# Altium PCB WEST_Radio_AX5043.PcbDoc (part 1 of 3)
Units mil, origin at the board's own origin, x right, y up, seen from the top; angles counter-clockwise.
Board outline 6000 x 4000 mil, 2 copper layers (Top Layer, Bottom Layer); 127 components, 96 nets, 412 pads, 18 vias.
Unrouted connection lines stored in the file: 276.
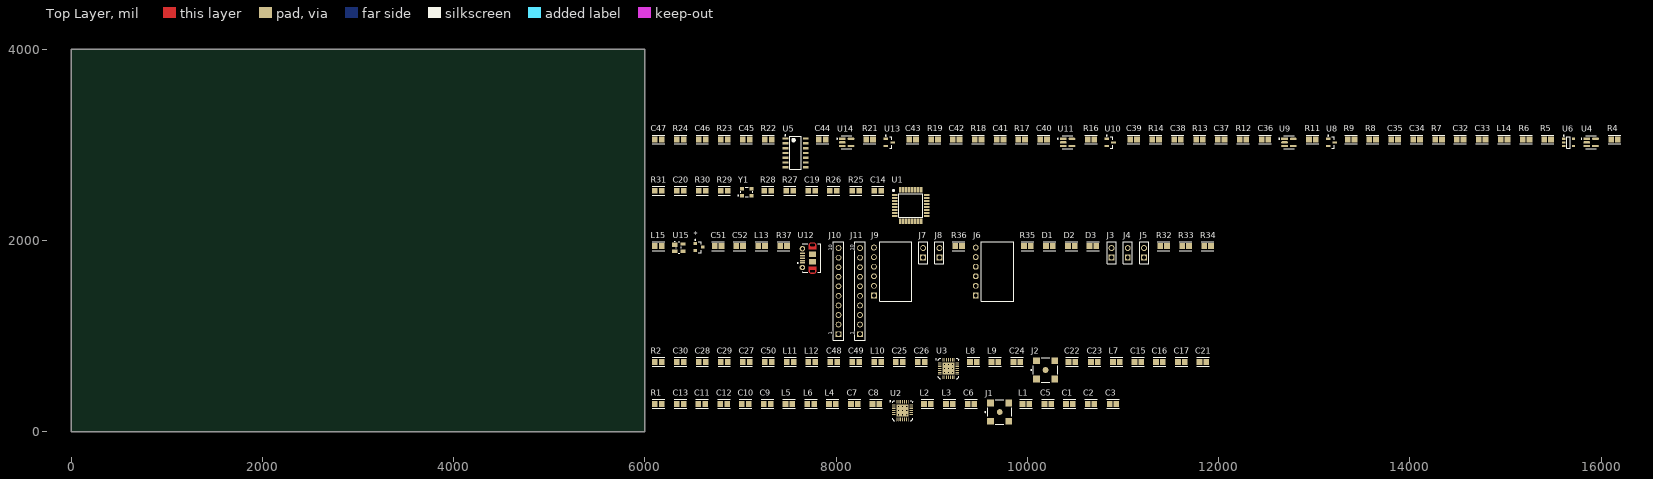
[diagram p0: Top Layer view]
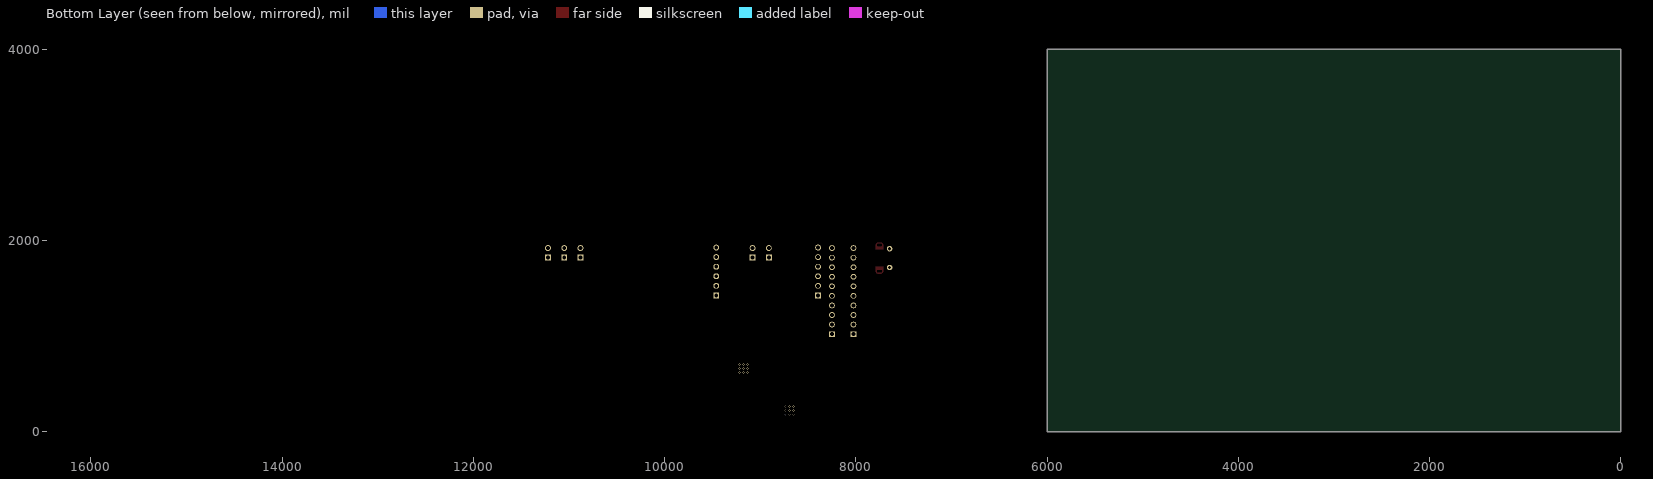
[diagram p1: Bottom Layer view, seen from below]

## Layer stack, top to bottom
Top Solder: solder mask 0.4, Solder Resist, Dk 3.5
Top Layer: signal copper 1.4
Dielectric 1: dielectric 12.6, FR-4, Dk 4.8
Bottom Layer: signal copper 1.4
Bottom Solder: solder mask 0.4, Solder Resist, Dk 3.5

## Board outline
0,0 6000,0 6000,4000 0,4000

## Design rules (kind name [scope] priority, off if disabled: settings)
Clearance [All] p1: gap=10 ignorepadtopadclearanceinfootprint=FALSE except(0: Arc-Hole Track-Hole SMDPad-Hole THPad-Hole Via-Hole Fill-Hole Poly-Hole Region-Hole Text-Hole)
PolygonConnect [All] p1: connectstyle=Relief reliefconductorwidth=10 reliefentries=4 polygonreliefangle="90 Angle" airgapwidth=10
RoomDefinition power_regulation [InComponentClass('power_regulation')] p1: confinementstyle=ConfineIn formatcopy=TRUE lockcomponents=FALSE outline 6045,2730 16235,2730 16235,3215 6045,3215
RoomDefinition mcu [InComponentClass('mcu')] p2: confinementstyle=ConfineIn formatcopy=TRUE lockcomponents=FALSE outline 6045,2150 8995,2150 8995,2680 6045,2680
RoomDefinition connectors [InComponentClass('connectors')] p3: confinementstyle=ConfineIn formatcopy=TRUE lockcomponents=FALSE outline 6045,940 11985,940 11985,2100 6045,2100
RoomDefinition comms_vhf [InComponentClass('comms_vhf')] p4: confinementstyle=ConfineIn formatcopy=TRUE lockcomponents=FALSE outline 6045,500 11930,500 11930,890 6045,890
RoomDefinition comms_uhf [InComponentClass('comms_uhf')] p5: confinementstyle=ConfineIn formatcopy=TRUE lockcomponents=FALSE outline 6045,60 10990,60 10990,450 6045,450
RoutingVias [All] p1: holewidth=28 width=50 viastyle="Through Hole" minholewidth=28 minwidth=50 maxholewidth=28 maxwidth=50
SolderMaskExpansion [All] p1: expansion=4 istentingtop=FALSE
Width [All] p1: maxlimit=10 minlimit=10 preferedwidth=10
30 further rules are at their usual default settings.

## Classes and differential pairs
component class power_regulation: C31 C32 C33 C34 C35 C36 C37 C38 C39 C40 C41 C42 C43 C44 C45 C46 C47 L14 R3 R4 R5 R6 R7 R8 R9 R10 R11 R12 R13 R14 R15 R16 R17 R18 R19 R20 R21 R22 R23 R24 U4 U5 U6 U8 U9 U10 U11 U13 U14
component class mcu: C14 C19 C20 R25 R26 R27 R28 R29 R30 R31 U1 Y1
component class connectors: * C51 C52 D1 D2 D3 J3 J4 J5 J6 J7 J8 J9 J10 J11 L13 L15 R32 R33 R34 R35 R36 R37 U12 U15
component class comms_vhf: C15 C16 C17 C18 C21 C22 C23 C24 C25 C26 C27 C28 C29 C30 C48 C49 C50 J2 L7 L8 L9 L10 L11 L12 R2 U3
component class comms_uhf: C1 C2 C3 C4 C5 C6 C7 C8 C9 C10 C11 C12 C13 J1 L1 L2 L3 L4 L5 L6 R1 U2

## Components (designator, comment, footprint, x,y, rotation, side; value= is the part's Value field where it differs from the comment)
* "BZX84C6V2LT1G" ONSC-SOT-23-3-318-08_V 6565,1930 r0 top
C1 "100pF" FP-C0805C-DN-IPC_A 10440,290 r0 top
C2 "100pF" FP-C0805C-DN-IPC_A 10665,290 r0 top
C3 "0.1uF" FP-C0805C-DN-IPC_A 10895,290 r0 top
C5 "11pF" FP-C0805C-DN-IPC_A 10215,290 r0 top
C6 "4.3pF" FP-C0805C-DN-IPC_A 9410,290 r0 top
C7 "4.3pF" FP-C0805C-DN-IPC_A 8190,290 r0 top
C8 "5.1pF" FP-C0805C-DN-IPC_A 8415,290 r0 top
C9 "5.6pF" FP-C0805C-DN-IPC_A 7280,290 r0 top
C10 "10pF" FP-C0805C-DN-IPC_A 7050,290 r0 top
C11 "0.01uF" FP-C0805C-DN-IPC_A 6595,290 r0 top
C12 "0.01uF" FP-C0805C-DN-IPC_A 6825,290 r0 top
C13 "6.8pF" FP-C0805C-DN-IPC_A 6370,290 r0 top
C14 "0.1uF" FP-C0805C-DN-IPC_A 8435,2520 r0 top
C15 "100pF" FP-C0805C-DN-IPC_A 11155,730 r0 top
C16 "100pF" FP-C0805C-DN-IPC_A 11380,730 r0 top
C17 "0.1uF" FP-C0805C-DN-IPC_A 11610,730 r0 top
C19 "0.1uF" FP-C0805C-DN-IPC_A 7745,2520 r0 top
C20 "0.1uF" FP-C0805C-DN-IPC_A 6370,2520 r0 top
C21 "6.8pF" FP-C0805C-DN-IPC_A 11835,730 r0 top
C22 "10pF" FP-C0805C-DN-IPC_A 10465,730 r0 top
C23 "12pF" FP-C0805C-DN-IPC_A 10700,730 r0 top
C24 "10pF" FP-C0805C-DN-IPC_A 9890,730 r0 top
C25 "10pF" FP-C0805C-DN-IPC_A 8660,730 r0 top
C26 "12pF" FP-C0805C-DN-IPC_A 8890,730 r0 top
C27 "10pF" FP-C0805C-DN-IPC_A 7060,730 r0 top
C28 "0.01uF" FP-C0805C-DN-IPC_A 6600,730 r0 top
C29 "0.01uF" FP-C0805C-DN-IPC_A 6830,730 r0 top
C30 "6.8pF" FP-C0805C-DN-IPC_A 6370,730 r0 top
C32 "0.1uF" FP-C0805C-DN-IPC_A 14525,3055 r0 top
C33 "0.1uF" FP-C0805C-DN-IPC_A 14755,3055 r0 top
C34 "10uF" FP-C0805C-DN-IPC_A 14070,3055 r0 top
C35 "0.1uF" FP-C0805C-DN-IPC_A 13840,3055 r0 top
C36 "1uF" FP-C0805C-DN-IPC_A 12485,3055 r0 top
C37 "1uF" FP-C0805C-DN-IPC_A 12025,3055 r0 top
C38 "0.1uF" FP-C0805C-DN-IPC_A 11570,3055 r0 top
C39 "0.1uF" FP-C0805C-DN-IPC_A 11110,3055 r0 top
C40 "1uF" FP-C0805C-DN-IPC_A 10170,3055 r0 top
C41 "1uF" FP-C0805C-DN-IPC_A 9715,3055 r0 top
C42 "0.1uF" FP-C0805C-DN-IPC_A 9255,3055 r0 top
C43 "0.1uF" FP-C0805C-DN-IPC_A 8800,3055 r0 top
C44 "1uF" FP-C0805C-DN-IPC_A 7855,3055 r0 top
C45 "1uF" FP-C0805C-DN-IPC_A 7060,3055 r0 top
C46 "0.1uF" FP-C0805C-DN-IPC_A 6600,3055 r0 top
C47 "0.1uF" FP-C0805C-DN-IPC_A 6140,3055 r0 top
C48 "27pF" FP-C0805C-DN-IPC_A 7975,730 r0 top
C49 "27pF" FP-C0805C-DN-IPC_A 8205,730 r0 top
C50 "10pF" FP-C0805C-DN-IPC_A 7290,730 r0 top
C51 "0.1uF" FP-C0805C-DN-IPC_A 6765,1940 r0 top
C52 "10uF" FP-C0805C-DN-IPC_A 6990,1940 r0 top
D1 "Blue" FP-C0805C-DN-IPC_A 10230,1940 r0 top
D2 "Blue" FP-C0805C-DN-IPC_A 10460,1940 r0 top
D3 "Blue" FP-C0805C-DN-IPC_A 10685,1940 r0 top
J1 "SMA" FP-73251-1350-MFG 9710,205 r0 top
J2 "SMA" FP-73251-1350-MFG 10190,645 r0 top
J3 "PA1" SMTC-SSQ-102-01-X-S 10880,1820 r90 top
J4 "PB9" SMTC-SSQ-102-01-X-S 11050,1820 r90 top
J5 "PB2" SMTC-SSQ-102-01-X-S 11220,1820 r90 top
J6 "UART" SMTC-SSW-106-02-X-S-RA 9460,1425 r90 top
J7 "DATA_V" SMTC-SSQ-102-01-X-S 8910,1820 r90 top
J8 "DATA_U" SMTC-SSQ-102-01-X-S 9080,1820 r90 top
J9 "SWD" SMTC-SSW-106-02-X-S-RA 8395,1425 r90 top
J10 "SPI_U" 61301011821 8025,1470 r90 top
J11 "SPI_V" 61301011821 8250,1470 r90 top
L1 "100nH" FP-C0805C-DN-IPC_A 9985,290 r0 top
L2 "43nH" FP-C0805C-DN-IPC_A 8955,290 r0 top
L3 "27nH" FP-C0805C-DN-IPC_A 9185,290 r0 top
L4 "43nH" FP-C0805C-DN-IPC_A 7960,290 r0 top
L5 "100nH" FP-C0805C-DN-IPC_A 7505,290 r0 top
L6 "27nH" FP-C0805C-DN-IPC_A 7735,290 r0 top
L7 "150nH" FP-C0805C-DN-IPC_A 10930,730 r0 top
L8 "120nH" FP-C0805C-DN-IPC_A 9435,730 r0 top
L9 "68nH" FP-C0805C-DN-IPC_A 9660,730 r0 top
L10 "120nH" FP-C0805C-DN-IPC_A 8435,730 r0 top
L11 "150nH" FP-C0805C-DN-IPC_A 7520,730 r0 top
L12 "68nH" FP-C0805C-DN-IPC_A 7745,730 r0 top
L13 "BLM21AG121SN1D" FP-C0805C-DN-IPC_A 7220,1940 r0 top
L14 "2.2uH" FP-C0805C-DN-IPC_A 14985,3055 r0 top
L15 "BLM21AG121SN1D" FP-C0805C-DN-IPC_A 6140,1940 r0 top
R1 "0ohm" FP-C0805C-DN-IPC_A 6140,290 r0 top
R2 "0ohm" FP-C0805C-DN-IPC_A 6140,730 r0 top
R4 "510k" FP-C0805C-DN-IPC_A 16140,3055 r0 top
R5 "510k" FP-C0805C-DN-IPC_A 15440,3055 r0 top
R6 "510k" FP-C0805C-DN-IPC_A 15215,3055 r0 top
R7 "510k" FP-C0805C-DN-IPC_A 14300,3055 r0 top
R8 "130K" FP-C0805C-DN-IPC_A 13610,3055 r0 top
R9 "100k" FP-C0805C-DN-IPC_A 13385,3055 r0 top
R11 "510k" FP-C0805C-DN-IPC_A 12980,3055 r0 top
R12 "510k" FP-C0805C-DN-IPC_A 12255,3055 r0 top
R13 "510k" FP-C0805C-DN-IPC_A 11800,3055 r0 top
R14 "330K" FP-C0805C-DN-IPC_A 11340,3055 r0 top
R16 "510k" FP-C0805C-DN-IPC_A 10665,3055 r0 top
R17 "510k" FP-C0805C-DN-IPC_A 9940,3055 r0 top
R18 "510k" FP-C0805C-DN-IPC_A 9485,3055 r0 top
R19 "330K" FP-C0805C-DN-IPC_A 9030,3055 r0 top
R21 "510k" FP-C0805C-DN-IPC_A 8350,3055 r0 top
R22 "510k" FP-C0805C-DN-IPC_A 7290,3055 r0 top
R23 "510k" FP-C0805C-DN-IPC_A 6830,3055 r0 top
R24 "330K" FP-C0805C-DN-IPC_A 6370,3055 r0 top
R25 "100R" FP-C0805C-DN-IPC_A 8205,2520 r0 top
R26 "10K" FP-C0805C-DN-IPC_A 7970,2520 r0 top
R27 "0ohm" FP-C0805C-DN-IPC_A 7515,2520 r0 top
R28 "0ohm" FP-C0805C-DN-IPC_A 7285,2520 r0 top
R29 "0ohm" FP-C0805C-DN-IPC_A 6830,2520 r0 top
R30 "0ohm" FP-C0805C-DN-IPC_A 6600,2520 r0 top
R31 "0ohm" FP-C0805C-DN-IPC_A 6140,2520 r0 top
R32 "1k" FP-C0805C-DN-IPC_A 11425,1940 r0 top
R33 "1k" FP-C0805C-DN-IPC_A 11655,1940 r0 top
R34 "1k" FP-C0805C-DN-IPC_A 11885,1940 r0 top
R35 "1k" FP-C0805C-DN-IPC_A 10000,1940 r0 top
R36 "1k" FP-C0805C-DN-IPC_A 9280,1940 r0 top
R37 "100k" FP-C0805C-DN-IPC_A 7450,1940 r0 top
U1 "STM32G0B1KET6" QFP80P900X900X160-32N 8780,2365 r0 top
U2 "AX5043" QFN50P500X500X90_HS-29N 8695,220 r0 top
U3 "AX5043" QFN50P500X500X90_HS-29N 9175,660 r0 top
U4 "INA168" FP-DBV0005A-IPC_A 15895,3025 r0 top
U5 "LMV324IDR" D0014A_V 7575,2915 r0 top
U6 "LMR10515YMFE" SOT95P245X145-5N 15660,3025 r0 top
U8 "MCP1700_3.3" SOT-23-TT3_L 13180,3025 r0 top
U9 "INA168" FP-DBV0005A-IPC_A 12735,3025 r0 top
U10 "MCP1700_3.3" SOT-23-TT3_L 10865,3025 r0 top
U11 "INA168" FP-DBV0005A-IPC_A 10420,3025 r0 top
U12 "MicroUSB_1050170001" USB-MICRO-B_V 7700,1815 r90 top
U13 "MCP1700_3.3" SOT-23-TT3_L 8555,3025 r0 top
U14 "INA168" FP-DBV0005A-IPC_A 8110,3025 r0 top
U15 "TVS_DIODE_SP0503BAHTG" LFUS-SOT143-4_V 6355,1925 r0 top
Y1 "16MHz" OSCCC320X250X100N 7065,2505 r0 top

## Footprints (in the part's own frame and the unit in brackets; to place one, negate y for a bottom-side part, rotate by r counter-clockwise, add the part's x,y. Pads: shape width x height; smd on the part's side, far side on the other; paste and mask are expansions set on the pad)
61301011821 [mm] "Socket Header, Pitch 2.54 mm, THT, Vertical, single row, 10p"
  rect 1.52x1.52 hole 1.02: 1(-11.43,0)
  round 1.52 hole 1.02: 2(-8.89,0) 3(-6.35,0) 4(-3.81,0) 5(-1.27,0) 6(1.27,0) 7(3.81,0) 8(6.35,0) 9(8.89,0) 10(11.43,0)
  silkscreen extent -13.08,-1.35 13.08,1.35, body extent -12.95,-1.25 12.95,1.25, height 8.55
D0014A_V [mm] "SOIC, 14-Leads, Body 8.75x4mm, Pitch 1.27mm"
  rect 1.55x0.6 smd: 1(-2.7,3.81) 2(-2.7,2.54) 3(-2.7,1.27) 4(-2.7,0) 5(-2.7,-1.27) 6(-2.7,-2.54) 7(-2.7,-3.81) 8(2.7,-3.81) 9(2.7,-2.54) 10(2.7,-1.27) 11(2.7,0) 12(2.7,1.27) 13(2.7,2.54) 14(2.7,3.81)
  silkscreen extent -2.82,-4.4 1.53,4.78, body extent -3,-4.4 3,4.4, height 1.75
FP-73251-1350-MFG [mil]
  round 60 smd paste+0 mask+0: 1(0,0)
  rect 70x70 smd paste+0 mask+0: 2(-95,95) 3(95,95) 4(-95,-95) 5(95,-95)
  silkscreen extent -155,-127 127,127, body extent -134,-134 134,134, height 10
FP-C0805C-DN-IPC_A [mil]
  rect 59.24x61.27 smd paste+0 mask+0: 1(-35.46,0) 2(35.46,0)
  silkscreen extent -65,-46 65,46, body extent -85,-50 85,50, height 10
FP-DBV0005A-IPC_A [mm]
  rect 1.805x0.612 smd paste+0 mask+0: 1(-1.15,0.95)
  rrect100% 1.805x0.612 smd paste+0 mask+0: 2(-1.15,0) 3(-1.15,-0.95) 4(1.15,-0.95) 5(1.15,0.95)
  silkscreen extent -2.68,-1.7 1.4,1.7, body extent -2.55,-1.95 2.55,1.95, height 0.25
LFUS-SOT143-4_V [mm] "SOT143, 4-Leads, Body 3.04x1.4mm, Pitch 1.90mm"
  rect 1.4x1.1 smd: 1(-1.1,0.75)
  rect 1.4x0.9 smd: 2(-1.1,-0.95) 3(1.1,-0.95) 4(1.1,0.95)
  silkscreen extent -1.15,-1.5 0.7,1.65, body extent -0.7,-1.52 0.7,1.52, height 1.22
ONSC-SOT-23-3-318-08_V [mm] "SOT23, 3-Leads, Body 2.92x1.3mm, Pitch 0.95mm"
  rect 0.9x0.8 smd: 1(-1,0.95) 2(-1,-0.95) 3(1,0)
  silkscreen extent -1.12,-1.46 0.65,2.02, body extent -0.65,-1.46 0.65,1.46, height 1.11
OSCCC320X250X100N [mm]
  rect 1.02x0.92 smd: 1(-1.225,-0.925) 2(1.225,-0.925) 3(1.225,0.925) 4(-1.225,0.925)
  silkscreen extent -2.35,-1.25 1.6,1.25, body extent -1.6,-1.25 1.6,1.25, height 1
QFN50P500X500X90_HS-29N [mm] "QFN, 28-Leads, Body 5.00x5.00mm, Pitch 0.50mm, Thermal Pad 3.25x3.25mm, IPC Medium Density"
  oval 1x0.25 smd: 1(-2.325,1.5) 2(-2.325,1) 3(-2.325,0.5) 4(-2.325,0) 5(-2.325,-0.5) 6(-2.325,-1) 7(-2.325,-1.5) 15(2.325,-1.5) 16(2.325,-1) 17(2.325,-0.5) 18(2.325,0) 19(2.325,0.5) 20(2.325,1) 21(2.325,1.5)
  oval 0.25x1 smd: 8(-1.5,-2.325) 9(-1,-2.325) 10(-0.5,-2.325) 11(0,-2.325) 12(0.5,-2.325) 13(1,-2.325) 14(1.5,-2.325) 22(1.5,2.325) 23(1,2.325) 24(0.5,2.325) 25(0,2.325) 26(-0.5,2.325) 27(-1,2.325) 28(-1.5,2.325)
  rect 3.25x3.25 smd: 29(0,0)
  silkscreen extent -3.45,-2.68 2.68,2.67, body extent -2.6,-2.6 2.6,2.6, height 0.95
QFP80P900X900X160-32N [mm]
  rect 1.475x0.6 smd: 1(-4.238,2.8) 2(-4.238,2) 3(-4.238,1.2) 4(-4.238,0.4) 5(-4.238,-0.4) 6(-4.238,-1.2) 7(-4.238,-2) 8(-4.238,-2.8) 17(4.238,-2.8) 18(4.238,-2) 19(4.238,-1.2) 20(4.238,-0.4) 21(4.238,0.4) 22(4.238,1.2) 23(4.238,2) 24(4.238,2.8)
  rect 0.6x1.475 smd: 9(-2.8,-4.238) 10(-2,-4.238) 11(-1.2,-4.238) 12(-0.4,-4.238) 13(0.4,-4.238) 14(1.2,-4.238) 15(2,-4.238) 16(2.8,-4.238) 25(2.8,4.238) 26(2,4.238) 27(1.2,4.238) 28(0.4,4.238) 29(-0.4,4.238) 30(-1.2,4.238) 31(-2,4.238) 32(-2.8,4.238)
  silkscreen extent -4.77,-3.15 3.15,4.2, body extent -4.5,-4.5 4.5,4.5, height 1.6
SMTC-SSQ-102-01-X-S [mm] "SQ Post Socket, 1x2 Pins, Vertical, 2.54mm Pitch, Female"
  rect 1.55x1.55 hole 1.02: 1(0,0)
  round 1.55 hole 1.02: 2(2.54,0)
  silkscreen extent -1.65,-1.2 4.19,1.2, body extent -1.52,-1.21 4.06,1.21, height 8.51
SMTC-SSW-106-02-X-S-RA [mm] "SQ Post Socket, 1x6 Pins, Right Angle, 2.54mm Pitch, Female"
  rect 1.55x1.55 hole 1.04: 1(0,0)
  round 1.55 hole 1.04: 2(2.54,0) 3(5.08,0) 4(7.62,0) 5(10.16,0) 6(12.7,0)
  silkscreen extent -1.53,-10.03 14.23,-1.52, body extent -1.52,-10.03 14.22,0.2, height 2.41
SOT95P245X145-5N [mm] "SOT23, 5-Leads, Body 2.96x2.45mm, Pitch 0.95mm, IPC Medium Density"
  rect 0.85x0.6 smd: 1(-1.275,0.95) 2(-1.275,0) 3(-1.275,-0.95) 4(1.275,-0.95) 5(1.275,0.95)
  silkscreen extent -1.4,-1.55 0.45,1.92, body extent -0.85,-1.55 0.85,1.55, height 1.45
SOT-23-TT3_L [mm] "SOT23, 3-Leads, Body 2.9x1.3mm, Pitch 0.95mm, Lead Span 2.4mm, IPC High Density"
  rect 1.2x0.6 smd: 1(-0.9,0.95) 2(-0.9,-0.95) 3(0.9,0)
  silkscreen extent -1.02,-1.55 0.7,1.92, body extent -0.7,-1.52 0.7,1.53, height 1.12
USB-MICRO-B_V [mm] "USB, MICRO B, Body 7.491x4.695 mm, Pitch 0.65 mm"
  rect 0.4x1.35 smd: 1(-1.3,1.35) 2(-0.65,1.35) 3(0,1.35) 4(0.65,1.35) 5(1.3,1.35)
  round 1.45 hole 0.85: 6(-2.5,1.35) 7(2.5,1.35)
  rrect50% 0x0 hole 0.6 slot 1.3 at 90 deg: 8(-3.5,-1.35) 11(3.5,-1.35)
  rect 1.5x1.9 smd: 9(-1,-1.35) 10(1,-1.35)
  Top Layer circle w0.5: c3.6,-0.9 r0.25
  Top Layer circle w0.5: c3.6,-1.8 r0.25
  Top Layer circle w0.5: c-3.6,-0.9 r0.25
  Top Layer circle w0.5: c-3.6,-1.8 r0.25
  Top Layer region: -2.3,-2.3 -2.3,-0.4 -3.6,-0.4 -3.6,-2.3
  Top Layer region: 2.3,-0.4 2.3,-2.3 3.6,-2.3 3.6,-0.4
  Top Layer region: 3.6,-0.9 3.6,-1.8 4.1,-1.8 4.1,-0.9
  Top Layer region: -3.6,-1.8 -3.6,-0.9 -4.1,-0.9 -4.1,-1.8
  silkscreen extent -3.75,-3.5 3.75,2.7, body extent -4.1,-3.9 4.1,1.5, height 2.67

## Part data
*: "Vz=6.2V 5.8V~6.6V Izt=5mA P=250mW", Breakdown Voltage=6.6V, Case/Package=SOT-23, Forward Voltage=900mV, Manufacturer="ON Semiconductor", Max Operating Temperature=150°C, Max Power Dissipation=225mW, Max Reverse Current=3uA, Min Operating Temperature=-65°C, Package Quantity=3000, Power Dissipation=300mW, Supplier Part Number 1=BZX84C6V2LT1GOSCT-ND, Test Current=5mA, Tolerance=6%, Voltage Rating (DC)=6.2V, Zener Current=10mA, Category="Zener Diodes", ComponentLink1Description=https://datasheet.ciiva.com/18434/70100187-18434638.pdf?src-supplier=Allied+Electronics, ComponentLink1URL=https://datasheet.ciiva.com/18434/70100187-18434638.pdf?src-supplier=Allied+Electronics, ComponentLink2Description=https://datasheet.ciiva.com/4731/bzx84c2v4lt1-d-71024-4731774.pdf?src-supplier=Mouser, ComponentLink2URL=https://datasheet.ciiva.com/4731/bzx84c2v4lt1-d-71024-4731774.pdf?src-supplier=Mouser, ComponentLink3Description=https://datasheet.ciiva.com/8345/bzx84c2v4lt1-d-8345722.pdf?src-supplier=Avnet, ComponentLink3URL=https://datasheet.ciiva.com/8345/bzx84c2v4lt1-d-8345722.pdf?src-supplier=Avnet, ComponentLink4Description=https://datasheet.ciiva.com/16348/bzx84c2v4lt1-d-16348201.pdf?src-supplier=Future+Electronics, ComponentLink4URL=https://datasheet.ciiva.com/16348/bzx84c2v4lt1-d-16348201.pdf?src-supplier=Future+Electronics, ComponentLink5Description=https://datasheet.ciiva.com/8347/bzx84c2v4lt1-d-8347285.pdf?src-supplier=Avnet, ComponentLink5URL=https://datasheet.ciiva.com/8347/bzx84c2v4lt1-d-8347285.pdf?src-supplier=Avnet, ComponentLink6Description=https://datasheet.ciiva.com/894/bzx84c2v4lt1-d-894738.pdf?src-supplier=Digi-Key, ComponentLink6URL=https://datasheet.ciiva.com/894/bzx84c2v4lt1-d-894738.pdf?src-supplier=Digi-Key, ComponentLink7Description=https://datasheet.ciiva.com/894/bzx84c2v4lt1-d-894739.pdf?src-supplier=Digi-Key, ComponentLink7URL=https://datasheet.ciiva.com/894/bzx84c2v4lt1-d-894739.pdf?src-supplier=Digi-Key, ComponentLink8Description=https://datasheet.ciiva.com/894/bzx84c2v4lt1-d-894737.pdf?src-supplier=Digi-Key, ComponentLink8URL=https://datasheet.ciiva.com/894/bzx84c2v4lt1-d-894737.pdf?src-supplier=Digi-Key, Contact Plating=Tin,Matte, Element Configuration=Single, ESD Protection=Yes, Height=0.94mm, Impedance=10R, Lead Free="Lead Free", Length=2.9mm, Manufacturer Part Number=BZX84C6V2LT1G, Material=Plastic, Max Reverse Leakage Current=3uA, Mount="Surface Mount", Number of Pins=3, Packaging="Tape and Reel", Power Rating=225mW, Pricing 1="1=0.18000, 10=0.16000, 100=0.08720, 500=0.05364, 1000=0.03657 (USD)", Radiation Hardening=No, REACH SVHC="No SVHC", RoHS=Yes, RoHS Compliant=Yes, Stock 1=1080, Supplier 1=Digi-Key, Termination=SMD/SMT, Voltage Tolerance=6%, Width=1.3mm, Working Voltage=6.2V, Zener Voltage=6.2V
C1 C2 C15 C16: library part C0805C101J1GACTU, "Multilayer Ceramic Capacitors (MLCC) - SMD/SMT 100volts 100pF C0G 5%", Case Code (Imperial)=0805, Case Code (Metric)=2012, Dielectric=C0G, Dielectric Material=Ceramic, Manufacturer=KEMET, Max Operating Temperature=125°C, Min Operating Temperature=-55°C, Package Quantity=1, Supplier Part Number 1=399-C0805C101J1GAC7800CT-ND, Temperature Coefficient=30ppm/°C, Tolerance=5%, Voltage=100V, Capacitance=100pF, Case/Package=0805, Category="Ceramic Capacitors", ComponentLink1Description=https://datasheet.ciiva.com/144/docfinderpartnumber-c0805c101j1gactu-144890.pdf?src-supplier=Digi-Key, ComponentLink1URL=https://datasheet.ciiva.com/144/docfinderpartnumber-c0805c101j1gactu-144890.pdf?src-supplier=Digi-Key, ComponentLink2Description=https://datasheet.ciiva.com/6126/f9080b-0402-series-c0g-6126695.pdf?src-supplier=Farnell, ComponentLink2URL=https://datasheet.ciiva.com/6126/f9080b-0402-series-c0g-6126695.pdf?src-supplier=Farnell, ComponentLink3Description=https://datasheet.ciiva.com/2988/kem-c1003-c0g-smd-2988557.pdf?src-supplier=Avnet, ComponentLink3URL=https://datasheet.ciiva.com/2988/kem-c1003-c0g-smd-2988557.pdf?src-supplier=Avnet, ComponentLink4Description=https://datasheet.ciiva.com/2988/kem-c1003-c0g-smd-2988558.pdf?src-supplier=Avnet, ComponentLink4URL=https://datasheet.ciiva.com/2988/kem-c1003-c0g-smd-2988558.pdf?src-supplier=Avnet, ComponentLink5Description=https://datasheet.ciiva.com/14589/70095383-14589484.pdf?src-supplier=Allied+Electronics, ComponentLink5URL=https://datasheet.ciiva.com/14589/70095383-14589484.pdf?src-supplier=Allied+Electronics, ComponentLink6Description=https://datasheet.ciiva.com/14591/70095383-14591851.pdf?src-supplier=Allied+Electronics, ComponentLink6URL=https://datasheet.ciiva.com/14591/70095383-14591851.pdf?src-supplier=Allied+Electronics, ComponentLink7Description=https://datasheet.ciiva.com/7842/40889-7842143.pdf?src-supplier=Element14, ComponentLink7URL=https://datasheet.ciiva.com/7842/40889-7842143.pdf?src-supplier=Element14, ComponentLink8Description=https://datasheet.ciiva.com/28688/1789732-28688663.pdf?src-supplier=Element14, ComponentLink8URL=https://datasheet.ciiva.com/28688/1789732-28688663.pdf?src-supplier=Element14, ComponentLink9Description=https://datasheet.ciiva.com/18193/getdatasheetpartid-93983-18193285.pdf?src-supplier=Verical, ComponentLink9URL=https://datasheet.ciiva.com/18193/getdatasheetpartid-93983-18193285.pdf?src-supplier=Verical, ComponentLink10Description=https://datasheet.ciiva.com/7405/1372242-7405224.pdf?src-supplier=Newark, ComponentLink10URL=https://datasheet.ciiva.com/7405/1372242-7405224.pdf?src-supplier=Newark, Construction=Flat, Contact Material=Tin, Contact Plating=Tin,Matte, Depth=1.25mm, Dissipation Factor=0.1%, Height=0.78mm, Lead Free="Lead Free", Lead Pitch=0.75mm, Length=2mm, Manufacturer Part Number=C0805C101J1GACTU, Mount="Surface Mount,PCB", Number of Pins=2, Packaging="Tape and Reel", Pricing 1="1=0.11000, 10=0.07900, 50=0.04500, 100=0.03730, 500=0.02616, 1000=0.02166 (USD)", Radiation Hardening=No, REACH SVHC="No SVHC", RoHS=Yes, RoHS Compliant=Yes, Series=C, Stock 1=41207, Supplier 1=Digi-Key, Termination=SMD/SMT, Thickness=0.035inch, Voltage Rating=100V, Voltage Rating (DC)=100V, Width=1.2mm
C3 C14 C17 C19 C20 C32 C33 C35 C38 C39 C42 C43 C46 C47 C51: library part C0805C104K5RACTU, "Cap Ceramic 0.1uF 50V X7R 10% SMD 2.0 x 1.2 mm 125 C Paper T/R", Capacitance=100nF, Case Code (Imperial)=0805, Case Code (Metric)=2012, Dielectric=X7R, Dielectric Material=Ceramic, Manufacturer=KEMET, Max Operating Temperature=125°C, Min Operating Temperature=-55°C, Package Quantity=4000, Supplier Part Number 1=399-C0805C104K5RAC7800CT-ND, Tolerance=10%, Voltage=500V, Voltage Rating=50V, Case/Package=0805, Category="Ceramic Capacitors", ComponentLink1Description=https://www.distrelec.biz/Web/Downloads/_t/ds/KEM_C1002_X7R_SMD_eng_tds.pdf?mime=application%2Fpdf&src-supplier=Distrelec, ComponentLink1URL=https://www.distrelec.biz/Web/Downloads/_t/ds/KEM_C1002_X7R_SMD_eng_tds.pdf?mime=application%2Fpdf&src-supplier=Distrelec, ComponentLink2Description=http://www.farnell.com/datasheets/2740684.pdf?src-supplier=Farnell, ComponentLink2URL=http://www.farnell.com/datasheets/2740684.pdf?src-supplier=Farnell, ComponentLink3Description=http://www.farnell.com/datasheets/2740684.pdf?src-supplier=Element14, ComponentLink3URL=http://www.farnell.com/datasheets/2740684.pdf?src-supplier=Element14, Construction=Flat, Contact Plating=Tin,Matte, Depth=1.25mm, Height=0.9mm, Lead Pitch=0.75mm, Length=2mm, Manufacturer Part Number=C0805C104K5RACTU, Mount="Surface Mount,PCB", Number of Pins=2, Packaging="Tape and Reel", Pricing 1="1=0.15000, 10=0.10500, 50=0.05960, 100=0.04940, 500=0.03466, 1000=0.02869 (USD)", Radiation Hardening=No, REACH SVHC="No SVHC", RoHS=Yes, RoHS Compliant=Yes, Series=C0805C, Stock 1=2034176, Supplier 1=Digi-Key, Termination=SMD/SMT, Thickness=0.035inch, Voltage Rating (DC)=50V, Width=1.2mm
C5: library part C0805C110J5GACTU, "Cap Ceramic 11pF 50V C0G 5% SMD 0805 125°C Plastic T/R", Case Code (Imperial)=0805, Case Code (Metric)=2012, Dielectric=C0G, Dielectric Material=Ceramic, Manufacturer=KEMET, Max Operating Temperature=125°C, Min Operating Temperature=-55°C, Package Quantity=1, Supplier Part Number 1=399-9164-1-ND, Tolerance=5%, Voltage Rating=50V, Capacitance=11pF, Case/Package=0805, Category="Ceramic Capacitors", ComponentLink1Description=https://datasheet.ciiva.com/5424/kem-c1003-c0g-smd-356956-5424409.pdf?src-supplier=Mouser, ComponentLink1URL=https://datasheet.ciiva.com/5424/kem-c1003-c0g-smd-356956-5424409.pdf?src-supplier=Mouser, Dissipation Factor=0.1%, Height=0.78mm, Lead Free="Lead Free", Lead Pitch=0.75mm, Length=0.079inch, Manufacturer Part Number=C0805C110J5GACTU, Mount="Surface Mount", Packaging="Tape and Reel", RoHS=Yes, RoHS Compliant=Yes, Series=C, Supplier 1=Digi-Key, Termination=SMD/SMT, Thickness=0.035inch, Voltage Rating (DC)=50V, Width=0.049inch
C6 C7: library part C0805C439D1GACTU, "Cap Ceramic 4.3pF 100V C0G 0.5pF SMD 0805 125°C Paper T/R", Case Code (Imperial)=0805, Case Code (Metric)=2012, Dielectric=C0G, Dielectric Material=Ceramic, Manufacturer=KEMET, Max Operating Temperature=125°C, Min Operating Temperature=-55°C, Package Quantity=4000, Supplier Part Number 1=C0805C439D1GACTU-ND, Voltage Rating=100V, Capacitance=4.3pF, Case/Package=0805, Category="Ceramic Capacitors", ComponentLink1Description=https://datasheet.ciiva.com/5440/kem-c1003-c0g-smd-356956-5440447.pdf?src-supplier=Mouser, ComponentLink1URL=https://datasheet.ciiva.com/5440/kem-c1003-c0g-smd-356956-5440447.pdf?src-supplier=Mouser, Depth=1.25mm, Height=0.78mm, Lead Free="Lead Free", Length=2mm, Manufacturer Part Number=C0805C439D1GACTU, Mount="Surface Mount", Packaging="Tape and Reel", RoHS=Yes, RoHS Compliant=Yes, Series=C, Supplier 1=Digi-Key, Termination=SMD/SMT, Thickness=0.035inch, Voltage Rating (DC)=100V, Weight=0.000194oz, Width=0.049inch
C8: library part C0805C519C5GACTU, "Cap Ceramic 5.1pF 50V C0G 0.25pF SMD 0805 125°C Paper T/R", Case Code (Imperial)=0805, Case Code (Metric)=2012, Dielectric=C0G, Dielectric Material=Ceramic, Manufacturer=KEMET, Max Operating Temperature=125°C, Min Operating Temperature=-55°C, Package Quantity=4000, Supplier Part Number 1=399-C0805C519C5GAC7800TR-ND, Voltage Rating=50V, Capacitance=5.1pF, Case/Package=0805, Category="Ceramic Capacitors", ComponentLink1Description=http://www.farnell.com/datasheets/2112203.pdf?src-supplier=Farnell, ComponentLink1URL=http://www.farnell.com/datasheets/2112203.pdf?src-supplier=Farnell, ComponentLink2Description=http://www.mouser.com/ds/2/212/KEM_C1003_C0G_SMD-1101588.pdf?src-supplier=Mouser, ComponentLink2URL=http://www.mouser.com/ds/2/212/KEM_C1003_C0G_SMD-1101588.pdf?src-supplier=Mouser, ComponentLink3Description=https://search.kemet.com/component-edge/download/datasheet/C0805C519C5GACTU.pdf?src-supplier=Digi-Key, ComponentLink3URL=https://search.kemet.com/component-edge/download/datasheet/C0805C519C5GACTU.pdf?src-supplier=Digi-Key, ComponentLink4Description=http://www.farnell.com/datasheets/2112203.pdf?src-supplier=Element14, ComponentLink4URL=http://www.farnell.com/datasheets/2112203.pdf?src-supplier=Element14, Dissipation Factor=0.1%, Lead Free="Lead Free", Length=0.079inch, Manufacturer Part Number=C0805C519C5GACTU, Mount="Surface Mount", Packaging="Tape and Reel", Pricing 1="4000=0.11781 (USD)", REACH SVHC="No SVHC", RoHS=Yes, RoHS Compliant=Yes, Series=C0805C, Supplier 1=Digi-Key, Termination=SMD/SMT, Thickness=0.035inch, Voltage Rating (DC)=50V, Width=1.2mm
C9: library part C0805C569D5GACTU, "Cap Ceramic 5.6pF 50V C0G 0.5pF SMD 0805 125°C Plastic T/R", Case Code (Imperial)=0805, Case Code (Metric)=2012, Dielectric=C0G, Dielectric Material=Ceramic, Manufacturer=KEMET, Max Operating Temperature=125°C, Min Operating Temperature=-55°C, Package Quantity=1, Supplier Part Number 1=399-C0805C569D5GAC7800CT-ND, Voltage Rating=50V, Capacitance=5.6pF, Case/Package=0805, Category="Ceramic Capacitors", ComponentLink1Description=https://www.distrelec.biz/Web/Downloads/_t/ds/KEM_C1003_C0G_SMD_eng_tds.pdf?mime=application%2Fpdf&src-supplier=Distrelec, ComponentLink1URL=https://www.distrelec.biz/Web/Downloads/_t/ds/KEM_C1003_C0G_SMD_eng_tds.pdf?mime=application%2Fpdf&src-supplier=Distrelec, ComponentLink2Description=http://www.mouser.com/ds/2/212/KEM_C1003_C0G_SMD-1101588.pdf?src-supplier=Mouser, ComponentLink2URL=http://www.mouser.com/ds/2/212/KEM_C1003_C0G_SMD-1101588.pdf?src-supplier=Mouser, ComponentLink3Description=https://api.kemet.com/component-edge/download/datasheet/C0805C569D5GACTU.pdf?src-supplier=Digi-Key, ComponentLink3URL=https://api.kemet.com/component-edge/download/datasheet/C0805C569D5GACTU.pdf?src-supplier=Digi-Key, ComponentLink4Description=https://search.kemet.com/component-edge/download/datasheet/C0805C569D5GACTU.pdf?src-supplier=Digi-Key, ComponentLink4URL=https://search.kemet.com/component-edge/download/datasheet/C0805C569D5GACTU.pdf?src-supplier=Digi-Key, Contact Material=Tin, Depth=1.25mm, Dissipation Factor=0.5%, Height=0.78mm, Lead Free="Lead Free", Lead Pitch=0.75mm, Length=2mm, Manufacturer Part Number=C0805C569D5GACTU, Mount="Surface Mount", Packaging="Tape and Reel", Pricing 1="1=0.24000, 10=0.16500, 50=0.11000, 100=0.09350, 500=0.06600, 1000=0.05775 (USD)", REACH SVHC="No SVHC", RoHS=Yes, RoHS Compliant=Yes, Series=C, Stock 1=16697, Supplier 1=Digi-Key, Termination=SMD/SMT, Thickness=0.035inch, Voltage Rating (DC)=50V, Width=0.049inch
C10 C22 C24 C25 C27 C50: library part C0805C100J1GACTU, "Cap Ceramic 10pF 100V C0G 5% SMD 0805 125C Plastic T/R", Case Code (Imperial)=0805, Case Code (Metric)=2012, Dielectric=C0G, Dielectric Material=Ceramic, Manufacturer=KEMET, Max Operating Temperature=125°C, Min Operating Temperature=-55°C, Package Quantity=1, Supplier Part Number 1=399-C0805C100J1GAC7800CT-ND, Temperature Coefficient=30ppm/°C, Tolerance=5%, Voltage=100V, Capacitance=10pF, Case/Package=0805, Category="Ceramic Capacitors", ComponentLink1Description=https://datasheet.ciiva.com/7842/kem-c1003-c0g-smd-7842137.pdf?src-supplier=Element14, ComponentLink1URL=https://datasheet.ciiva.com/7842/kem-c1003-c0g-smd-7842137.pdf?src-supplier=Element14, ComponentLink2Description=https://datasheet.ciiva.com/7842/kem-c1003-c0g-smd-7842136.pdf?src-supplier=Element14, ComponentLink2URL=https://datasheet.ciiva.com/7842/kem-c1003-c0g-smd-7842136.pdf?src-supplier=Element14, ComponentLink3Description=https://datasheet.ciiva.com/28668/1789732-28668725.pdf?src-supplier=Element14, ComponentLink3URL=https://datasheet.ciiva.com/28668/1789732-28668725.pdf?src-supplier=Element14, ComponentLink4Description=https://datasheet.ciiva.com/14588/70095383-14588189.pdf?src-supplier=Allied+Electronics, ComponentLink4URL=https://datasheet.ciiva.com/14588/70095383-14588189.pdf?src-supplier=Allied+Electronics, ComponentLink5Description=https://datasheet.ciiva.com/14603/70095383-14603133.pdf?src-supplier=Allied+Electronics, ComponentLink5URL=https://datasheet.ciiva.com/14603/70095383-14603133.pdf?src-supplier=Allied+Electronics, Construction=Flat, Contact Material=Tin, Depth=1.25mm, Dissipation Factor=0.1%, Height=0.78mm, Lead Free="Lead Free", Length=2mm, Manufacturer Part Number=C0805C100J1GACTU, Mount="Surface Mount,PCB", Number of Pins=2, Packaging="Tape and Reel", Pricing 1="1=0.20000, 10=0.14000, 50=0.07960, 100=0.06600, 500=0.04630, 1000=0.03833 (USD)", Radiation Hardening=No, REACH SVHC="No SVHC", RoHS=Yes, RoHS Compliant=Yes, Series=C, Stock 1=26087, Supplier 1=Digi-Key, Termination=SMD/SMT, Thickness=0.035inch, Voltage Rating=100V, Voltage Rating (DC)=100V, Weight=0.000194oz, Width=0.049inch
C11 C12 C28 C29: library part C0805C103K5RAC-TU, "Cap Ceramic 0.01uF 50V X7R 10% SMD 0805 125C Plastic T/R", Capacitance=10nF, Case Code (Imperial)=0805, Case Code (Metric)=2012, Dielectric=X7R, Dielectric Material=Ceramic, Manufacturer=KEMET, Max Operating Temperature=125°C, Min Operating Temperature=-55°C, Package Quantity=4000, Supplier Part Number 1=2644371, Tolerance=10%, Voltage=50V, Case/Package=0805, Category="Ceramic Capacitors", ComponentLink1Description=https://datasheet.ciiva.com/7172/1828800-7172412.pdf?src-supplier=Newark, ComponentLink1URL=https://datasheet.ciiva.com/7172/1828800-7172412.pdf?src-supplier=Newark, ComponentLink2Description=https://datasheet.ciiva.com/5904/kem-c1002-x7r-smd-5904709.pdf?src-supplier=Farnell, ComponentLink2URL=https://datasheet.ciiva.com/5904/kem-c1002-x7r-smd-5904709.pdf?src-supplier=Farnell, ComponentLink3Description=https://datasheet.ciiva.com/7842/kem-c1002-x7r-smd-7842533.pdf?src-supplier=Element14, ComponentLink3URL=https://datasheet.ciiva.com/7842/kem-c1002-x7r-smd-7842533.pdf?src-supplier=Element14, ComponentLink4Description=https://datasheet.ciiva.com/28672/1851736-28672830.pdf?src-supplier=Element14, ComponentLink4URL=https://datasheet.ciiva.com/28672/1851736-28672830.pdf?src-supplier=Element14, ComponentLink5Description=https://datasheet.ciiva.com/26923/getdatasheetpartid-759674-26923957.pdf?src-supplier=Verical, ComponentLink5URL=https://datasheet.ciiva.com/26923/getdatasheetpartid-759674-26923957.pdf?src-supplier=Verical, ComponentLink6Description=https://datasheet.ciiva.com/39122/docfinderpartnumberc0402c102k5ractu-39122923.pdf?src-supplier=Onlinecomponents.com, ComponentLink6URL=https://datasheet.ciiva.com/39122/docfinderpartnumberc0402c102k5ractu-39122923.pdf?src-supplier=Onlinecomponents.com, Construction=Flat, Depth=1.25mm, Height=0.78mm, Lead Pitch=0.75mm, Length=2mm, Manufacturer Part Number=C0805C103K5RAC-TU, Mount="PCB,Surface Mount", Number of Pins=2, Packaging="Tape and Reel", Pricing 1="25=0.14500, 100=0.13600, 250=0.12500, 500=0.11800, 1250=0.10800 (USD)", Radiation Hardening=No, REACH SVHC="No SVHC", RoHS=Yes, Series=C0805C, Stock 1=8800, Supplier 1=RSComponents, Termination=SMD/SMT, Thickness=0.035inch, Voltage Rating=50V, Voltage Rating (DC)=50V, Width=1.2mm
C13 C21 C30: library part C0805C689D5GACTU, "Cap Ceramic 6.8pF 50V C0G 0.5pF SMD 0805 125°C Plastic T/R", Case Code (Imperial)=0805, Case Code (Metric)=2012, Dielectric=C0G, Dielectric Material=Ceramic, Manufacturer=KEMET, Max Operating Temperature=125°C, Min Operating Temperature=-55°C, Package Quantity=1, Supplier Part Number 1=399-C0805C689D5GAC7800CT-ND, Voltage Rating=50V, Capacitance=6.8pF, Case/Package=0805, Category="Ceramic Capacitors", ComponentLink1Description=https://www.distrelec.biz/Web/Downloads/_t/ds/KEM_C1003_C0G_SMD_eng_tds.pdf?mime=application%2Fpdf&src-supplier=Distrelec, ComponentLink1URL=https://www.distrelec.biz/Web/Downloads/_t/ds/KEM_C1003_C0G_SMD_eng_tds.pdf?mime=application%2Fpdf&src-supplier=Distrelec, ComponentLink2Description=http://www.farnell.com/datasheets/2330629.pdf?src-supplier=Farnell, ComponentLink2URL=http://www.farnell.com/datasheets/2330629.pdf?src-supplier=Farnell, ComponentLink3Description=http://www.mouser.com/ds/2/212/KEM_C1003_C0G_SMD-1101588.pdf?src-supplier=Mouser, ComponentLink3URL=http://www.mouser.com/ds/2/212/KEM_C1003_C0G_SMD-1101588.pdf?src-supplier=Mouser, ComponentLink4Description=http://www.farnell.com/datasheets/2330629.pdf?src-supplier=Newark, ComponentLink4URL=http://www.farnell.com/datasheets/2330629.pdf?src-supplier=Newark, ComponentLink5Description=https://api.kemet.com/component-edge/download/datasheet/C0805C689D5GACTU.pdf?src-supplier=Digi-Key, ComponentLink5URL=https://api.kemet.com/component-edge/download/datasheet/C0805C689D5GACTU.pdf?src-supplier=Digi-Key, ComponentLink6Description=https://search.kemet.com/component-edge/download/datasheet/C0805C689D5GACTU.pdf?src-supplier=Digi-Key, ComponentLink6URL=https://search.kemet.com/component-edge/download/datasheet/C0805C689D5GACTU.pdf?src-supplier=Digi-Key, Construction=Flat, Contact Material=Tin, Depth=1.25mm, Dissipation Factor=0.1%, Height=0.78mm, Lead Free="Lead Free", Lead Pitch=0.75mm, Length=2mm, Manufacturer Part Number=C0805C689D5GACTU, Mount="Surface Mount", Packaging="Tape and Reel", Pricing 1="1=0.24000, 10=0.16500, 50=0.11000, 100=0.09350, 500=0.06600, 1000=0.05775 (USD)", Radiation Hardening=No, REACH SVHC="No SVHC", RoHS=Yes, RoHS Compliant=Yes, Series=C, Stock 1=43898, Supplier 1=Digi-Key, Termination=SMD/SMT, Thickness=0.035inch, Voltage Rating (DC)=50V, Width=0.049inch
C23 C26: library part C0805C120J5GACTU, "0805 C 12pF Ceramic Multilayer Capacitor; 50 VDC; +125degC; C0G Dielec; +/-5%", Case Code (Imperial)=0805, Case Code (Metric)=2012, Dielectric=C0G, Dielectric Material=Ceramic, Manufacturer=KEMET, Max Operating Temperature=125°C, Min Operating Temperature=-55°C, Package Quantity=1, Supplier Part Number 1=399-C0805C120J5GAC7800CT-ND, Temperature Coefficient=30ppm/°C, Tolerance=5%, Voltage=50V, Capacitance=12pF, Case/Package=0805, Category="Ceramic Capacitors", ComponentLink1Description=https://datasheet.ciiva.com/6136/1732692-6136713.pdf?src-supplier=Farnell, ComponentLink1URL=https://datasheet.ciiva.com/6136/1732692-6136713.pdf?src-supplier=Farnell, ComponentLink2Description=https://datasheet.ciiva.com/144/docfinderpartnumber-c0805c120j5gactu-144980.pdf?src-supplier=Digi-Key, ComponentLink2URL=https://datasheet.ciiva.com/144/docfinderpartnumber-c0805c120j5gactu-144980.pdf?src-supplier=Digi-Key, ComponentLink3Description=https://datasheet.ciiva.com/7842/1732692-7842203.pdf?src-supplier=Element14, ComponentLink3URL=https://datasheet.ciiva.com/7842/1732692-7842203.pdf?src-supplier=Element14, ComponentLink4Description=https://datasheet.ciiva.com/7842/1732692-7842204.pdf?src-supplier=Element14, ComponentLink4URL=https://datasheet.ciiva.com/7842/1732692-7842204.pdf?src-supplier=Element14, ComponentLink5Description=https://datasheet.ciiva.com/28696/1789732-28696013.pdf?src-supplier=Element14, ComponentLink5URL=https://datasheet.ciiva.com/28696/1789732-28696013.pdf?src-supplier=Element14, ComponentLink6Description=https://datasheet.ciiva.com/14586/70095383-14586716.pdf?src-supplier=Allied+Electronics, ComponentLink6URL=https://datasheet.ciiva.com/14586/70095383-14586716.pdf?src-supplier=Allied+Electronics, ComponentLink7Description=https://datasheet.ciiva.com/5418/kem-c1003-c0g-smd-356956-5418089.pdf?src-supplier=Mouser, ComponentLink7URL=https://datasheet.ciiva.com/5418/kem-c1003-c0g-smd-356956-5418089.pdf?src-supplier=Mouser, ComponentLink8Description=https://datasheet.ciiva.com/11463/kem-c1003-c0g-smd-11463493.pdf?src-supplier=Avnet, ComponentLink8URL=https://datasheet.ciiva.com/11463/kem-c1003-c0g-smd-11463493.pdf?src-supplier=Avnet, ComponentLink9Description=https://datasheet.ciiva.com/18193/getdatasheetpartid-179336-18193526.pdf?src-supplier=Verical, ComponentLink9URL=https://datasheet.ciiva.com/18193/getdatasheetpartid-179336-18193526.pdf?src-supplier=Verical, Construction=Flat, Contact Material=Tin, Depth=1.25mm, Dissipation Factor=0.1%, Height=0.78mm, Lead Free="Lead Free", Lead Pitch=0.75mm, Length=2mm, Manufacturer Part Number=C0805C120J5GACTU, Mount="Surface Mount,PCB", Number of Pins=2, Packaging="Tape and Reel", Pricing 1="1=0.13000, 10=0.09300, 50=0.05260, 100=0.04350, 500=0.03054, 1000=0.02528 (USD)", Radiation Hardening=No, REACH SVHC="No SVHC", RoHS=Yes, RoHS Compliant=Yes, Series=C, Stock 1=165027, Supplier 1=Digi-Key, Termination=SMD/SMT, Thickness=0.035inch, Voltage Rating=50V, Voltage Rating (DC)=50V, Width=0.049inch
C34 C52: library part GRM21BR61C106KE15L, "贴片电容（MLCC） 10μF ±10% 16V X5R 0805", Case Code (Imperial)=0805, Case Code (Metric)=2012, Dielectric=X5R, Manufacturer=Murata, Max Operating Temperature=85°C, Min Operating Temperature=-55°C, Package Quantity=1, Supplier Part Number 1=490-3886-1-ND, Tolerance=10%, Voltage=16V, Capacitance=10uF, Case/Package=0805, Category="Ceramic Capacitors", ComponentLink1Description=https://datasheet.ciiva.com/7719/1747468-7719090.pdf?src-supplier=Element14, ComponentLink1URL=https://datasheet.ciiva.com/7719/1747468-7719090.pdf?src-supplier=Element14, ComponentLink2Description=https://datasheet.ciiva.com/23628/460993-23628598.pdf?src-supplier=Newark, ComponentLink2URL=https://datasheet.ciiva.com/23628/460993-23628598.pdf?src-supplier=Newark, ComponentLink3Description=https://datasheet.ciiva.com/2989/product-2989696.pdf?src-supplier=Avnet, ComponentLink3URL=https://datasheet.ciiva.com/2989/product-2989696.pdf?src-supplier=Avnet, ComponentLink4Description=https://datasheet.ciiva.com/3777/1956grm21br61c106ke1523-3777137.pdf?src-supplier=Arrow+Electronics, ComponentLink4URL=https://datasheet.ciiva.com/3777/1956grm21br61c106ke1523-3777137.pdf?src-supplier=Arrow+Electronics, ComponentLink5Description=https://datasheet.ciiva.com/29202/450891-da-01-de-vs-chip-kond-0805-10-0-uf-10pr-16-0v-x5r-29202696.pdf?src-supplier=Conrad, ComponentLink5URL=https://datasheet.ciiva.com/29202/450891-da-01-de-vs-chip-kond-0805-10-0-uf-10pr-16-0v-x5r-29202696.pdf?src-supplier=Conrad, ComponentLink6Description=https://datasheet.ciiva.com/29199/454607-da-01-en-vs-kondensator-0805-29199611.pdf?src-supplier=Conrad, ComponentLink6URL=https://datasheet.ciiva.com/29199/454607-da-01-en-vs-kondensator-0805-29199611.pdf?src-supplier=Conrad, ComponentLink7Description=https://datasheet.ciiva.com/137/partnumbering-e-01-137918.pdf?src-supplier=Digi-Key, ComponentLink7URL=https://datasheet.ciiva.com/137/partnumbering-e-01-137918.pdf?src-supplier=Digi-Key, ComponentLink8Description=https://datasheet.ciiva.com/137/partnumbering-e-01-137917.pdf?src-supplier=Digi-Key, ComponentLink8URL=https://datasheet.ciiva.com/137/partnumbering-e-01-137917.pdf?src-supplier=Digi-Key, ComponentLink9Description=https://datasheet.ciiva.com/137/partnumbering-e-01-137919.pdf?src-supplier=Digi-Key, ComponentLink9URL=https://datasheet.ciiva.com/137/partnumbering-e-01-137919.pdf?src-supplier=Digi-Key, ComponentLink10Description=https://datasheet.ciiva.com/2989/product-2989697.pdf?src-supplier=Avnet, ComponentLink10URL=https://datasheet.ciiva.com/2989/product-2989697.pdf?src-supplier=Avnet, Construction=Flat, Depth=1.25mm, Height=1.25mm, Lead Free="Lead Free", Length=2mm, Manufacturer Part Number=GRM21BR61C106KE15L, Material=Ceramic, Mount="Surface Mount", Packaging="Tape and Reel", Pricing 1="1=0.18000, 10=0.12400, 50=0.07420, 100=0.06270, 500=0.04292, 1000=0.03798 (USD)", Radiation Hardening=No, REACH SVHC="No SVHC", RoHS=Yes, RoHS Compliant=Yes, Series=GRM, Stock 1=9508002, Supplier 1=Digi-Key, Termination=SMD/SMT, Thickness=0.053inch, Voltage Rating=16V, Voltage Rating (DC)=16V, Width=1.25mm
C36 C37 C40 C41 C44 C45: library part C0805C105K4PACTU, "Cap Ceramic 1uF 16V X5R 10% SMD 0805 85C Plastic T/R", Case Code (Imperial)=0805, Case Code (Metric)=2012, Dielectric=X5R, Dielectric Material=Ceramic, Manufacturer=KEMET, Max Operating Temperature=85°C, Min Operating Temperature=-55°C, Package Quantity=1, Supplier Part Number 1=399-C0805C105K4PAC7800CT-ND, Tolerance=10%, Voltage=16V, Capacitance=1uF, Case/Package=0805, Category="Ceramic Capacitors", ComponentLink1Description=http://www.farnell.com/datasheets/2745930.pdf?src-supplier=Farnell, ComponentLink1URL=http://www.farnell.com/datasheets/2745930.pdf?src-supplier=Farnell, ComponentLink2Description=http://uk.rs-online.com/webdocs/13da/0900766b813daa10.pdf?src-supplier=RSComponents, ComponentLink2URL=http://uk.rs-online.com/webdocs/13da/0900766b813daa10.pdf?src-supplier=RSComponents, ComponentLink3Description=http://components.arrow.com/part/dataview/43037300S8313636N7429?src-supplier=Arrow+Electronics, ComponentLink3URL=http://components.arrow.com/part/dataview/43037300S8313636N7429?src-supplier=Arrow+Electronics, ComponentLink4Description=http://uk.rs-online.com/webdocs/13da/0900766b813daa0f.pdf?src-supplier=RSComponents, ComponentLink4URL=http://uk.rs-online.com/webdocs/13da/0900766b813daa0f.pdf?src-supplier=RSComponents, ComponentLink5Description=https://search.kemet.com/component-edge/download/datasheet/C0805C105K4PAC.pdf?src-supplier=Avnet, ComponentLink5URL=https://search.kemet.com/component-edge/download/datasheet/C0805C105K4PAC.pdf?src-supplier=Avnet, ComponentLink6Description=http://www.farnell.com/datasheets/2745930.pdf?src-supplier=Newark, ComponentLink6URL=http://www.farnell.com/datasheets/2745930.pdf?src-supplier=Newark, ComponentLink7Description=https://search.kemet.com/component-edge/download/datasheet/C0805C105K4PAC.pdf?src-supplier=Allied+Electronics, ComponentLink7URL=https://search.kemet.com/component-edge/download/datasheet/C0805C105K4PAC.pdf?src-supplier=Allied+Electronics, ComponentLink8Description=http://www.farnell.com/datasheets/2745930.pdf?src-supplier=Element14, ComponentLink8URL=http://www.farnell.com/datasheets/2745930.pdf?src-supplier=Element14, ComponentLink9Description=https://www.verical.com/server-webapp/html/getDatasheet?partID=127986&src-supplier=Verical, ComponentLink9URL=https://www.verical.com/server-webapp/html/getDatasheet?partID=127986&src-supplier=Verical, ComponentLink10Description=http://www.farnell.com/datasheets/1824493.pdf?src-supplier=Newark, ComponentLink10URL=http://www.farnell.com/datasheets/1824493.pdf?src-supplier=Newark, ComponentLink11Description=http://www.kemet.com/Lists/ProductCatalog/Attachments/19/KEM_C1006_X5R_SMD.pdf?src-supplier=Avnet, ComponentLink11URL=http://www.kemet.com/Lists/ProductCatalog/Attachments/19/KEM_C1006_X5R_SMD.pdf?src-supplier=Avnet, ComponentLink12Description=https://search.kemet.com/component-edge/download/datasheet/C0805C105K4PAC.pdf?src-supplier=Mouser, ComponentLink12URL=https://search.kemet.com/component-edge/download/datasheet/C0805C105K4PAC.pdf?src-supplier=Mouser, ComponentLink13Description=https://api.kemet.com/component-edge/download/datasheet/C0805C105K4PAC.pdf?src-supplier=Digi-Key, ComponentLink13URL=https://api.kemet.com/component-edge/download/datasheet/C0805C105K4PAC.pdf?src-supplier=Digi-Key, ComponentLink14Description=https://search.kemet.com/component-edge/download/datasheet/C0805C105K4PAC.pdf?src-supplier=TTI, ComponentLink14URL=https://search.kemet.com/component-edge/download/datasheet/C0805C105K4PAC.pdf?src-supplier=TTI, Construction=Flat, Depth=1.25mm, Dissipation Factor=5%, Height=1.25mm, Lead Free="Lead Free", Length=2mm, Manufacturer Part Number=C0805C105K4PACTU, Mount="Surface Mount,PCB", Packaging="Tape and Reel", Pricing 1="1=0.20000, 10=0.13400, 50=0.08060, 100=0.06810, 500=0.04662, 1000=0.04124 (USD)", Radiation Hardening=No, REACH SVHC="No SVHC", RoHS=Yes, RoHS Compliant=Yes, Series=C0805C, Stock 1=112717, Supplier 1=Digi-Key, Termination=SMD/SMT, Thickness=0.055inch, Voltage Rating=16V, Voltage Rating (DC)=16V, Width=0.049inch
C48 C49: library part C0805C270J5GACTU, "Cap Ceramic 27pF ±5% 50V C0G, NP0 0805", Case Code (Imperial)=0805, Case Code (Metric)=2012, Dielectric=C0G, Dielectric Material=Ceramic, Manufacturer=KEMET, Max Operating Temperature=125°C, Min Operating Temperature=-55°C, Package Quantity=4000, Supplier Part Number 1=399-C0805C270J5GAC7800CT-ND, Temperature Coefficient=30ppm/°C, Tolerance=5%, Voltage=50V, Capacitance=27pF, Case/Package=0805, Category="Ceramic Capacitors", ComponentLink1Description=https://datasheet.ciiva.com/7842/f9080b-0402-series-c0g-7842586.pdf?src-supplier=Element14, ComponentLink1URL=https://datasheet.ciiva.com/7842/f9080b-0402-series-c0g-7842586.pdf?src-supplier=Element14, ComponentLink2Description=https://datasheet.ciiva.com/18193/getdatasheetpartid-385709-18193707.pdf?src-supplier=Verical, ComponentLink2URL=https://datasheet.ciiva.com/18193/getdatasheetpartid-385709-18193707.pdf?src-supplier=Verical, Construction=Flat, Contact Material=Tin, Contact Plating=Tin,Matte, Depth=1.25mm, Dissipation Factor=0.1%, Height=0.78mm, Lead Free="Lead Free", Lead Pitch=0.75mm, Length=2mm, Manufacturer Part Number=C0805C270J5GACTU, Mount="Surface Mount,PCB", Packaging="Tape and Reel", Pricing 1="1=0.10000, 10=0.07600, 50=0.04160, 100=0.03400, 500=0.02426, 1000=0.01906 (USD)", Radiation Hardening=No, REACH SVHC="No SVHC", RoHS=Yes, RoHS Compliant=Yes, Series=C0805C, Stock 1=95279, Supplier 1=Digi-Key, Termination=SMD/SMT, Voltage Rating=50V, Voltage Rating (DC)=50V, Width=1.2mm
D1 D2 D3: library part LTST-C170TBKT, "LED BLUE CLEAR 0805 SMD", Case Code (Imperial)=0805, Case Code (Metric)=2012, Forward Current=20mA, Forward Voltage=3.8V, Lens Color=Colorless, Manufacturer="Vishay Lite-On", Max Operating Temperature=80°C, Min Operating Temperature=-20°C, Package Quantity=1, Power Dissipation=76mW, Reverse Voltage=5V, Supplier Part Number 1=160-1579-1-ND, Case/Package=0805, Category=LEDs, Color=Blue, ComponentLink1Description=https://datasheet.ciiva.com/27055/1996161-27055955.pdf?src-supplier=Jameco, ComponentLink1URL=https://datasheet.ciiva.com/27055/1996161-27055955.pdf?src-supplier=Jameco, ComponentLink2Description=https://datasheet.ciiva.com/11773/0900766b80dc0281-11773879.pdf?src-supplier=RSComponents, ComponentLink2URL=https://datasheet.ciiva.com/11773/0900766b80dc0281-11773879.pdf?src-supplier=RSComponents, ComponentLink3Description=https://datasheet.ciiva.com/12400/lite-on-ltst-c170tbkt-190169-12400787.pdf?src-supplier=Mouser, ComponentLink3URL=https://datasheet.ciiva.com/12400/lite-on-ltst-c170tbkt-190169-12400787.pdf?src-supplier=Mouser, ComponentLink4Description=https://datasheet.ciiva.com/16199/lite-on20ltst-c170tbkt-16199611.pdf?src-supplier=Future+Electronics, ComponentLink4URL=https://datasheet.ciiva.com/16199/lite-on20ltst-c170tbkt-16199611.pdf?src-supplier=Future+Electronics, ComponentLink5Description=https://datasheet.ciiva.com/15117/getdatasheetpartid-103986-15117447.pdf?src-supplier=Verical, ComponentLink5URL=https://datasheet.ciiva.com/15117/getdatasheetpartid-103986-15117447.pdf?src-supplier=Verical, ComponentLink6Description=https://datasheet.ciiva.com/25764/ltst-c170tbkt-25764828.pdf?src-supplier=Allied+Electronics, ComponentLink6URL=https://datasheet.ciiva.com/25764/ltst-c170tbkt-25764828.pdf?src-supplier=Allied+Electronics, ComponentLink7Description=https://datasheet.ciiva.com/2110/s-110-ltst-c170tbkt-2110489.pdf?src-supplier=Digi-Key, ComponentLink7URL=https://datasheet.ciiva.com/2110/s-110-ltst-c170tbkt-2110489.pdf?src-supplier=Digi-Key, ComponentLink8Description=https://datasheet.ciiva.com/2110/s-110-ltst-c170tbkt-2110488.pdf?src-supplier=Digi-Key, ComponentLink8URL=https://datasheet.ciiva.com/2110/s-110-ltst-c170tbkt-2110488.pdf?src-supplier=Digi-Key, ComponentLink9Description=https://datasheet.ciiva.com/2110/s-110-ltst-c170tbkt-2110490.pdf?src-supplier=Digi-Key, ComponentLink9URL=https://datasheet.ciiva.com/2110/s-110-ltst-c170tbkt-2110490.pdf?src-supplier=Digi-Key, Depth=1.25mm, Dominant Wavelength=475nm, Height=1.1mm, Illumination Color=Blue, Lead Free="Lead Free", Length=2mm, Lens Style=Diffused,Colorless,Clear,Rectangular, Lens Transparency=Clear, Luminous Intensity=180mcd, Manufacturer Part Number=LTST-C170TBKT, Mount="Surface Mount", Number of Elements=1, Number of LEDs=1, Number of Pins=2, Packaging="Tape and Reel", Power Rating=76mW, Pricing 1="1=0.36000, 10=0.23900, 100=0.15930, 500=0.11016, 1000=0.09180 (USD)", Radiation Hardening=No, RoHS=Yes, RoHS Compliant=Yes, Series=-, Stock 1=153274, Supplier 1=Digi-Key, Test Current=20mA, Viewing Angle=130°, Wavelength=468nm, Width=1.25mm